# Altium PCB TinyBoard.PcbDoc
Units mil, origin at the board's own origin, x right, y up, seen from the top; angles counter-clockwise.
Board outline 785 x 3205 mil, 2 copper layers (Top Layer, Bottom Layer); 102 components, 79 nets, 303 pads, 74 vias.
Unrouted connection lines stored in the file: 1.
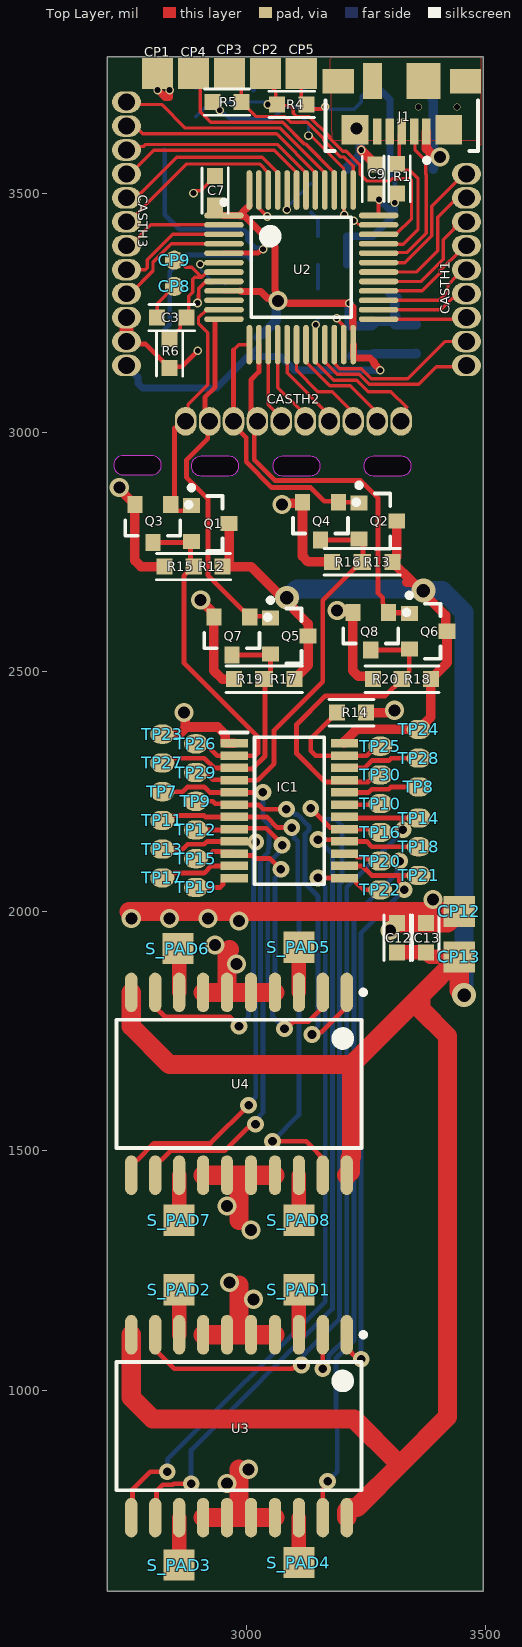
[diagram p0: Top Layer view]
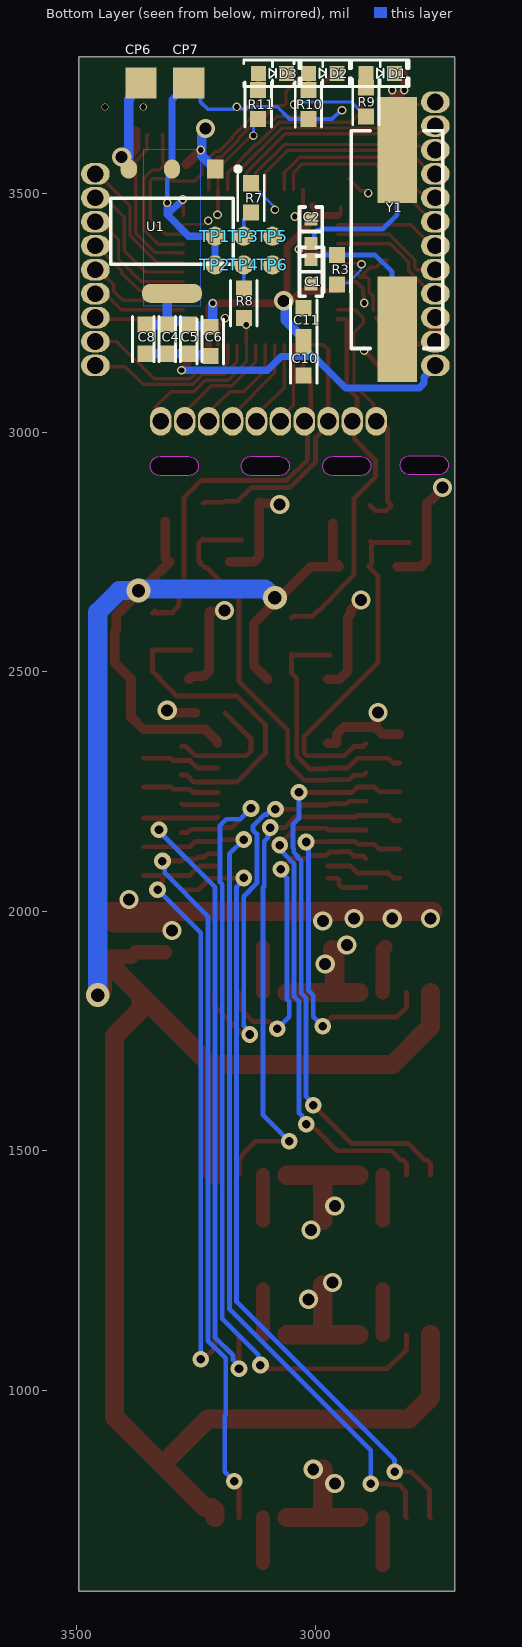
[diagram p1: Bottom Layer view, seen from below]
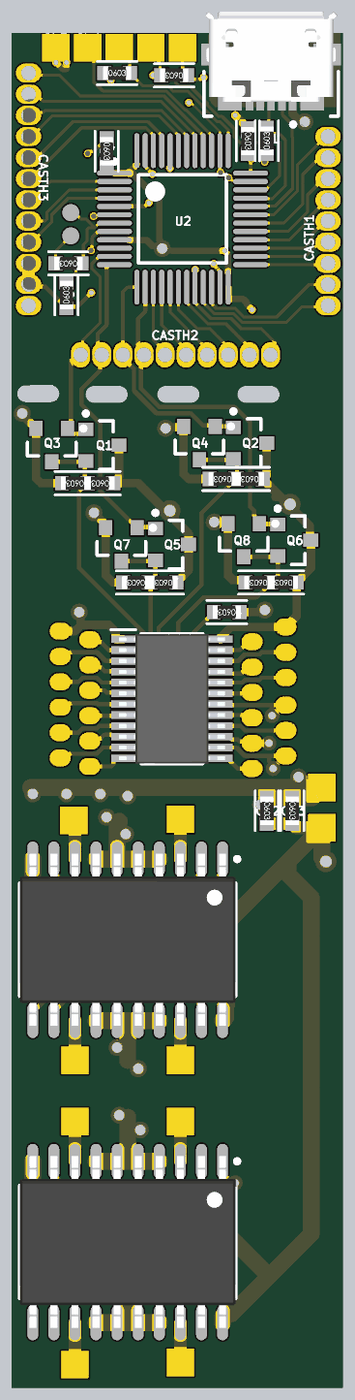
[diagram p2: 3D render of the assembled board from above, using the file's embedded part models]
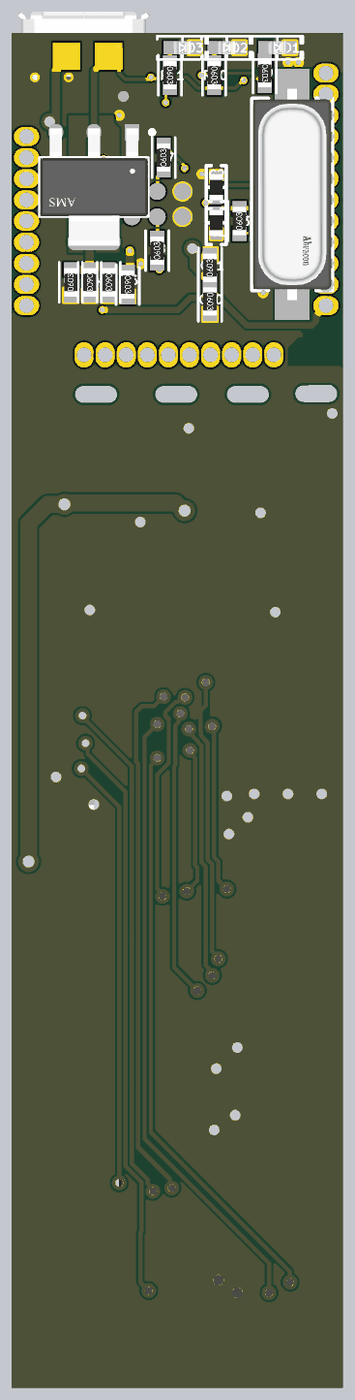
[diagram p3: 3D render of the assembled board from below, using the file's embedded part models]

## Layer stack, top to bottom
Top Solder: solder mask 0.4, Solder Resist, Dk 3.5
Top Layer: signal copper 1.4
Dielectric 1: dielectric 12.6, FR-4, Dk 4.8
Bottom Layer: signal copper 1.4
Bottom Solder: solder mask 0.4, Solder Resist, Dk 3.5

## Board outline
2710,580 2710,3785 3495,3785 3495,580
cut-out: 3265,2910 3325,2910 ccw(c3325,2930) 3325,2950 3265,2950 3265.07,2949.96 ccw(c3265.06,2929.98)
cut-out: 3075,2910 3135,2910 ccw(c3135,2930) 3135,2950 3075,2950 3075.07,2949.96 ccw(c3075.06,2929.98)
cut-out: 2905,2910 2965,2910 ccw(c2965,2930) 2965,2950 2905,2950 2905.07,2949.96 ccw(c2905.06,2929.98)
cut-out: 2743.02,2911.74 2803.02,2911.74 ccw(c2803.02,2931.74) 2803.02,2951.74 2743.02,2951.74 2743.09,2951.7 ccw(c2743.07,2931.72)

## Design rules (kind name [scope] priority, off if disabled: settings)
Clearance [All] p1: gap=5 ignorepadtopadclearanceinfootprint=FALSE except(0: Arc-Hole Track-Hole SMDPad-Hole THPad-Hole Via-Hole Fill-Hole Poly-Hole Region-Hole Text-Hole; 10: Fill-Text Poly-Text Region-Text Text-Text)
ComponentClearance [All] p1: gap=10 collisioncheckmode=3 verticalgap=10 showdistances=FALSE donotcheckwithout3dbody=TRUE
DiffPairsRouting [All] p1: maxlimit=10 minlimit=10 mostfreqgap=10 toplayer_minwidth=7 toplayer_maxwidth=15 toplayer_prefwidth=15 bottomlayer_minwidth=7 bottomlayer_maxwidth=15 bottomlayer_prefwidth=15 maxuncoupledlength=500
PolygonConnect [All] p1: connectstyle=Direct reliefconductorwidth=10 reliefentries=4 polygonreliefangle="90 Angle" airgapwidth=10
RoutingVias [All] p1: holewidth=18 width=35 viastyle="Through Hole" minholewidth=12 minwidth=30 maxholewidth=28 maxwidth=60
SolderMaskExpansion [All] p1: expansion=4 istentingtop=FALSE
SupplyNets "Schematic Supply Nets_2" [InNet('GND')] p1: voltage=0.000
SupplyNets "Schematic Supply Nets_1" [InNet('3V3')] p2: voltage=0.000
SupplyNets "Schematic Supply Nets" [InNet('5V')] p3: voltage=0.000
Width [All] p1: maxlimit=50 minlimit=5 preferedwidth=10 minimp=50.000000 maximp=50.000000 favimp=50.000000
28 further rules are at their usual default settings.

## Classes and differential pairs
component class addons_Hbridge,shiftReg: C12 C13 CP12 CP13 IC1 Q1 Q2 Q3 Q4 Q5 Q6 Q7 Q8 R12 R13 R14 R15 R16 R17 R18 R19 R20 S_PAD1 S_PAD2 S_PAD3 S_PAD4 S_PAD5 S_PAD6 S_PAD7 S_PAD8 TP7 TP8 TP9 TP10 TP11 TP12 TP13 TP14 TP15 TP16 TP17 TP18 TP19 TP20 TP21 TP22 TP23 TP24 TP25 TP26 TP27 TP28 TP29 TP30 U3 U4
component class Designator: C1 C2 C3 C4 C5 C6 C7 C8 C9 C10 C11 CASTH1 CASTH2 CASTH3 CP1 CP2 CP3 CP4 CP5 CP6 CP7 CP8 CP9 D1 D2 D3 J1 R1 R3 R4 R5 R6 R7 R8 R9 R10 R11 TP1 TP2 TP3 TP4 TP5 TP6 U1 U2 Y1
differential pair D: +D_P -D_N

## Components (designator, comment, footprint, x,y, rotation, side; value= is the part's Value field where it differs from the comment)
C1 "Capacitor" "CAP FILM 0603_1608" 3010,3335.59 r90 bottom value=10pF
C2 "Capacitor" "CAP FILM 0603_1608" 3010,3420 r270 bottom value=10pF
C3 "100nF" SMD-0603-RES 2844.49,3240 r90 top
C4 "10uF" SMD-0603-RES 3310,3195 r0 bottom
C5 "100nF" SMD-0603-RES 3265,3195 r0 bottom
C6 "100nF" SMD-0603-RES 3220,3190 r0 bottom
C7 "100nF" SMD-0603-RES 2935,3505 r180 top
C8 "100nF" SMD-0603-RES 3355,3195 r180 bottom
C9 "100nF" SMD-0603-RES 3270,3529.49 r180 top
C10 "1uF" SMD-0603-RES 3025,3150 r0 bottom
C11 "100nF" SMD-0603-RES 3025,3229.49 r180 bottom
C12 "Capacitor" SMD-0603-RES 3315,1945 r180 top value=100n
C13 "Capacitor" SMD-0603-RES 3375,1945 r180 top value=100n
CASTH1 "CastHeaderx10" NORM_HEADERX10 2873.5,3023.5 r270 top
CASTH2 "CastHeaderx9" NORM_HEADERX9 3460,3540 r180 top
CASTH3 "CastHeaderx12" NORM_HEADERX12 2750,3140 r0 top
CP1 "CONNECT_PAD" PAD_SQUARE 2815,3750 r0 top
CP2 "CONNECT_PAD" PAD_SQUARE 3040,3750 r90 top
CP3 "CONNECT_PAD" PAD_SQUARE 2965,3750 r90 top
CP4 "CONNECT_PAD" PAD_SQUARE 2890,3750 r90 top
CP5 "CONNECT_PAD" PAD_SQUARE 3115,3750 r90 top
CP6 "CONNECT_PAD" PAD_SQUARE 3365,3730 r90 bottom
CP7 "CONNECT_PAD" PAD_SQUARE 3265,3730 r90 bottom
CP8 "CONNECT_PAD" PCBComponent_1 2850,3305 r90 top
CP9 "CONNECT_PAD" PCBComponent_1 2850,3360 r90 top
CP12 "CONNECT_PAD" PAD_SQUARE 3445,2000 r90 top
CP13 "CONNECT_PAD" PAD_SQUARE 3445,1905 r90 top
D1 "Value" "LED 0603_1608" 2865,3750 r180 bottom
D2 "Value" "LED 0603_1608" 2985,3750 r180 bottom
D3 "Value" "LED 0603_1608" 3090,3750 r180 bottom
IC1 "STP16C596ATTR" SOP65P638X110-24N 3090,2210 r0 top
J1 "473460001" FP-473460001-MFG 3325,3720 r180 top
Q1 "BC807-40LT1G" ONSC-SOT-23-3-318-08_V 2925,2810 r0 top
Q2 "BC807-40LT1G" ONSC-SOT-23-3-318-08_V 3275,2815 r0 top
Q3 "MMBTA42LT1G" ONSC-SOT-23-3-318-08_V 2805,2810 r270 top
Q4 "MMBTA42LT1G" ONSC-SOT-23-3-318-08_V 3155,2815 r270 top
Q5 "BC807-40LT1G" ONSC-SOT-23-3-318-08_V 3090,2575 r0 top
Q6 "BC807-40LT1G" ONSC-SOT-23-3-318-08_V 3380,2585 r0 top
Q7 "MMBTA42LT1G" ONSC-SOT-23-3-318-08_V 2970,2575 r270 top
Q8 "MMBTA42LT1G" ONSC-SOT-23-3-318-08_V 3260,2585 r270 top
R1 "Resistor" SMD-0603-RES 3315,3530 r0 top value=1K5
R3 "Resistor" SMD-0603-RES 2955,3340 r180 bottom value=2K
R4 "10K" SMD-0603-RES 3095,3685 r90 top
R5 "10K" SMD-0603-RES 2960,3690 r270 top
R6 "10K" SMD-0603-RES 2840,3165 r0 top
R7 "100K" SMD-0603-RES 3135,3490 r180 bottom
R8 "100K" SMD-0603-RES 3150,3270 r180 bottom
R9 "150R" SMD-0603-RES 2895,3690 r0 bottom
R10 "470R" SMD-0603-RES 3015,3685 r0 bottom
R11 "150R" SMD-0603-RES 3120,3685 r0 bottom
R12 "Resistor" SMD-0603-RES 2920,2720 r90 top value=10K
R13 "Resistor" SMD-0603-RES 3274.49,2730 r90 top value=10K
R14 "Resistor" SMD-0603-RES 3220,2415 r90 top value=1K
R15 "Resistor" SMD-0603-RES 2860,2720 r90 top value=10K
R16 "Resistor" SMD-0603-RES 3210,2730 r90 top value=10K
R17 "Resistor" SMD-0603-RES 3070,2485 r90 top value=10K
R18 "Resistor" SMD-0603-RES 3355,2485 r90 top value=10K
R19 "Resistor" SMD-0603-RES 3005,2485 r90 top value=10K
R20 "Resistor" SMD-0603-RES 3295,2485 r90 top value=10K
S_PAD1 "SOLDER_PAD" PAD_SQUARE 3110,1210 r90 top
S_PAD2 "SOLDER_PAD" PAD_SQUARE 2860,1210 r90 top
S_PAD3 "SOLDER_PAD" PAD_SQUARE 2860,635 r90 top
S_PAD4 "SOLDER_PAD" PAD_SQUARE 3110,640 r90 top
S_PAD5 "SOLDER_PAD" PAD_SQUARE 3110,1925 r90 top
S_PAD6 "SOLDER_PAD" PAD_SQUARE 2857.5,1922.5 r90 top
S_PAD7 "SOLDER_PAD" PAD_SQUARE 2860,1355 r90 top
S_PAD8 "SOLDER_PAD" PAD_SQUARE 3110,1355 r90 top
TP1 "Value" PCBComponent_1 3210,3410 r90 bottom
TP2 "Value" PCBComponent_1 3210,3350 r90 bottom
TP3 "Value" PCBComponent_1 3150,3410 r90 bottom
TP4 "Value" PCBComponent_1 3150,3350 r90 bottom
TP5 "Value" PCBComponent_1 3090,3410 r90 bottom
TP6 "Value" PCBComponent_1 3090,3350 r90 bottom
TP7 "=Value" ROUND_SMALL 2825,2250 r90 top
TP8 "=Value" ROUND_SMALL 3360,2260 r270 top
TP9 "=Value" ROUND_SMALL 2895,2230 r270 top
TP10 "=Value" ROUND_SMALL 3280,2225 r270 top
TP11 "=Value" ROUND_SMALL 2825,2190 r270 top
TP12 "=Value" ROUND_SMALL 2895,2170 r270 top
TP13 "=Value" ROUND_SMALL 2825,2130 r270 top
TP14 "=Value" ROUND_SMALL 3360,2195 r270 top
TP15 "=Value" ROUND_SMALL 2895,2110 r270 top
TP16 "=Value" ROUND_SMALL 3280,2165 r270 top
TP17 "=Value" ROUND_SMALL 2825,2070 r270 top
TP18 "=Value" ROUND_SMALL 3360,2135 r270 top
TP19 "=Value" ROUND_SMALL 2895,2050 r270 top
TP20 "=Value" ROUND_SMALL 3280,2105 r270 top
TP21 "=Value" ROUND_SMALL 3360,2075 r270 top
TP22 "=Value" ROUND_SMALL 3280,2045 r270 top
TP23 "=Value" ROUND_SMALL 2825,2370 r270 top
TP24 "=Value" ROUND_SMALL 3360,2380 r270 top
TP25 "=Value" ROUND_SMALL 3280,2345 r270 top
TP26 "=Value" ROUND_SMALL 2895,2350 r270 top
TP27 "=Value" ROUND_SMALL 2825,2310 r270 top
TP28 "=Value" ROUND_SMALL 3360,2320 r270 top
TP29 "=Value" ROUND_SMALL 2895,2290 r270 top
TP30 "=Value" ROUND_SMALL 3280,2285 r270 top
U1 "AMS1117-3.3" FP-AMS1117-IPC_C 3300,3420.43 r270 bottom
U2 "STM32F103C6T6A" STM-LQFP48_M 3115,3345 r0 top locked
U3 "L293DD" STM-SOIC-20_M 2985,925 r270 top
U4 "L293DD" STM-SOIC-20_M 2985,1640 r270 top
Y1 "ABLS-8.000MHZ-B2-T" FP-ABLS-MFG 2830,3402.99 r270 bottom

## Footprints (in the part's own frame and the unit in brackets; to place one, negate y for a bottom-side part, rotate by r counter-clockwise, add the part's x,y. Pads: shape width x height; smd on the part's side, far side on the other; paste and mask are expansions set on the pad)
"CAP FILM 0603_1608" [mm] "Chip Capacitor, 2-Leads, Body 1.60x0.80mm, IPC Medium Density"
  rect 0.7x0.7 smd: 1(-0.65,0) 2(0.65,0)
  silkscreen extent -1.3,-0.6 1.3,0.6, body extent -0.8,-0.4 0.8,0.4, height 0.7
FP-473460001-MFG [mm]
  rect 0.45x1.38 smd paste+0 mask+0: 1(-1.3,2.31) 2(-0.65,2.31) 3(0,2.31) 4(0.65,2.31) 5(1.3,2.31)
  rect 1.425x1.55 smd paste+0 mask+0: 6(-2.488,2.225) 7(2.488,2.225)
  rect 1.65x1.3 smd paste+0 mask+0: 8(-3.375,-0.35) 11(3.375,-0.35)
  rect 1.8x1.9 smd paste+0 mask+0: 9(-1.15,-0.35)
  rect 1x1.9 smd paste+0 mask+0: 10(1.55,-0.35)
  silkscreen extent -4.05,0.67 4.05,3.97, body extent -4.3,-2.48 4.3,3.45, height 0.25
FP-ABLS-MFG [mm]
  rect 5.6x2.1 smd paste+0 mask+0: 1(-4.75,0) 2(4.75,0)
  silkscreen extent -5.77,-2.42 5.77,2.42, body extent -6.35,-2.35 6.35,2.35, height 4.3
FP-AMS1117-IPC_C [mm]
  rect 1.004x0.872 smd paste+0 mask+0: 1(-3.295,2.29)
  rrect100% 1.004x0.872 smd paste+0 mask+0: 2(-3.295,0) 3(-3.295,-2.29)
  rrect87% 1.004x3.182 smd paste+0 mask+0: 4(3.295,0)
  silkscreen extent -3.42,-3.25 1.75,3.62, body extent -3.53,-3.25 3.53,3.25, height 1.8
"LED 0603_1608" [mm] "Chip Diode, 2-Leads, Body 1.60x0.80mm, IPC Medium Density"
  rect 0.8x0.8 smd: 1(-0.75,0) 2(0.75,0)
  silkscreen extent -1.52,-0.7 1.52,0.7, body extent -0.8,-0.4 0.8,0.4, height 0.53
NORM_HEADERX9 [mil]
  oval 60x45 hole 35: 1(0,0) 2(0,50) 3(0,100) 4(0,150) 5(0,200) 6(0,250) 7(0,300) 8(0,350) 9(0,400)
NORM_HEADERX10 [mil]
  oval 60x45 hole 35: 1(0,0) 2(0,50) 3(0,100) 4(0,150) 5(0,200) 6(0,250) 7(0,300) 8(0,350) 9(0,400) 10(0,450)
NORM_HEADERX12 [mil]
  oval 60x45 hole 35: 1(0,0) 2(0,50) 3(0,100) 4(0,150) 5(0,200) 6(0,250) 7(0,300) 8(0,350) 9(0,400) 10(0,450) 11(0,500) 12(0,550)
ONSC-SOT-23-3-318-08_V [mm] "SOT23, 3-Leads, Body 2.92x1.3mm, Pitch 0.95mm"
  rect 0.9x0.8 smd: 1(-1,0.95) 2(-1,-0.95) 3(1,0)
  silkscreen extent -1.12,-1.46 0.65,2.02, body extent -0.65,-1.46 0.65,1.46, height 1.11
PAD_SQUARE [mil]
  rect 65x65 smd paste-99999: 1(0,0)
PCBComponent_1 [mil]
  round 40 smd: 1(0,0)
ROUND_SMALL [mil]
  oval 40x50 smd paste-99999: 1(0,0)
SMD-0603-RES [mm]
  rect 0.85x0.85 smd: 1(0,0.775) 2(0,-0.775)
  silkscreen extent -0.7,-1.2 0.7,1.2, body extent -0.4,-0.85 0.4,0.85, height 0.56
SOP65P638X110-24N [mm]
  rect 1.45x0.45 smd: 1(-2.925,3.575) 2(-2.925,2.925) 3(-2.925,2.275) 4(-2.925,1.625) 5(-2.925,0.975) 6(-2.925,0.325) 7(-2.925,-0.325) 8(-2.925,-0.975) 9(-2.925,-1.625) 10(-2.925,-2.275) 11(-2.925,-2.925) 12(-2.925,-3.575) 13(2.925,-3.575) 14(2.925,-2.925) 15(2.925,-2.275) 16(2.925,-1.625) 17(2.925,-0.975) 18(2.925,-0.325) 19(2.925,0.325) 20(2.925,0.975) 21(2.925,1.625) 22(2.925,2.275) 23(2.925,2.925) 24(2.925,3.575)
  silkscreen extent -3.65,-3.9 1.85,4.15, body extent -3.19,-3.9 3.19,3.9, height 1.1
STM-LQFP48_M [mm] "QFP, 48-Leads, Body 7x7mm, Pitch 0.5mm, IPC Low Density"
  oval 2.1x0.3 smd: 1(-4.1,2.75) 2(-4.1,2.25) 3(-4.1,1.75) 4(-4.1,1.25) 5(-4.1,0.75) 6(-4.1,0.25) 7(-4.1,-0.25) 8(-4.1,-0.75) 9(-4.1,-1.25) 10(-4.1,-1.75) 11(-4.1,-2.25) 12(-4.1,-2.75) 25(4.1,-2.75) 26(4.1,-2.25) 27(4.1,-1.75) 28(4.1,-1.25) 29(4.1,-0.75) 30(4.1,-0.25) 31(4.1,0.25) 32(4.1,0.75) 33(4.1,1.25) 34(4.1,1.75) 35(4.1,2.25) 36(4.1,2.75)
  oval 0.3x2.1 smd: 13(-2.75,-4.1) 14(-2.25,-4.1) 15(-1.75,-4.1) 16(-1.25,-4.1) 17(-0.75,-4.1) 18(-0.25,-4.1) 19(0.25,-4.1) 20(0.75,-4.1) 21(1.25,-4.1) 22(1.75,-4.1) 23(2.25,-4.1) 24(2.75,-4.1) 37(2.75,4.1) 38(2.25,4.1) 39(1.75,4.1) 40(1.25,4.1) 41(0.75,4.1) 42(0.25,4.1) 43(-0.25,4.1) 44(-0.75,4.1) 45(-1.25,4.1) 46(-1.75,4.1) 47(-2.25,4.1) 48(-2.75,4.1)
  silkscreen extent -4.22,-2.65 2.65,3.57, body extent -3.5,-3.5 3.5,3.5, height 1.6
STM-SOIC-20_M [mm] "SOIC, 20-Leads, Body 13x7.6mm, Pitch 1.27mm, IPC Low Density"
  oval 2.1x0.65 smd: 1(-4.85,5.715) 2(-4.85,4.445) 3(-4.85,3.175) 4(-4.85,1.905) 5(-4.85,0.635) 6(-4.85,-0.635) 7(-4.85,-1.905) 8(-4.85,-3.175) 9(-4.85,-4.445) 10(-4.85,-5.715) 11(4.85,-5.715) 12(4.85,-4.445) 13(4.85,-3.175) 14(4.85,-1.905) 15(4.85,-0.635) 16(4.85,0.635) 17(4.85,1.905) 18(4.85,3.175) 19(4.85,4.445) 20(4.85,5.715)
  silkscreen extent -4.97,-6.5 3.4,6.72, body extent -5.16,-6.5 5.16,6.5, height 2.65

## Part data
C3 C4 C5 C6 C7 C8 C9 C10 C11: library part Capacitor, "SMT Capacitor"
D1: library part LED, "orange"
D2: library part LED, "green"
D3: library part LED, "blue"
IC1: "Integrated Circuit", Manufacturer_Name=STMicroelectronics, Mouser Part Number=N/A, Datasheet Link=https://www.st.com/resource/en/datasheet/cd00005085.pdf, Height=1.1mm, Manufacturer_Part_Number=STP16C596ATTR, Mouser Price/Stock=https://www.mouser.co.uk/ProductDetail/STMicroelectronics/STP16C596ATTR?qs=y2Ae8b0edtM6tyumk2sS7g%3D%3D
J1: library part CMP-2000-05246-2, "CONN RCPT USB2.0 MICRO B SMD R/A", Current Rating=1.8A, Manufacturer=Molex, Package=0, Temperature="-30°C to +85°C", Temperature Range High=+85°C, Temperature Range Low=-30°C, Voltage Rating=30V, Automotive=No, Category=Conn, ComponentLink2Description=Datasheet, ComponentLink2URL=https://www.molex.com/webdocs/datasheets/pdf/en-us/0473460001_IO_CONNECTORS.pdf, Conn Orientation="Right Angle", Contact Material=Gold,Nickel, Device Class L1=Connectors, Device Class L2="USB Connectors", Device Class L3=unset, Digikey Description="CONN RCPT USB2.0 MICRO B SMD R/A", Footprint Url=https://www.molex.com/pdm_docs/sd/473460001_sd.pdf, Height=2.945mm, Is Female=yes, Lead Free=Yes, Manufacturer Part Number=473460001, Number of Contacts=5, Octopart=https://octopart.com/47346-0001-molex-7164928, Pitch=0.65mm, RoHS=TRUE, Shielding=true, Usb Standard="USB 2.0"
Q1 Q2 Q5 Q6: library part CMP-1048-00745-1, "General Purpose Transistor, PNP Silicon, 3-Pin SOT-23, Pb-Free, Tape and Reel", Manufacturer="On Semiconductor", ComponentLink1Description="Manufacturer URL", ComponentLink1URL=http://www.onsemi.com/, ComponentLink2Description=Datasheet, ComponentLink2URL=http://www.onsemi.com/pub_link/Collateral/BC807-16LT1-D.PDF, ComponentLink3Description="Package Specification", ComponentLink3URL=http://www.onsemi.cn/pub_link/Collateral/318-08.PDF, DatasheetVersion="Rev. 10", fT Min (MHz)=100, IC Continuous (A)=-0.5, Mounting Technology="Surface Mount", PackageDescription="3-Pin Small Outline Transistor, Body 2.92 x 1.3 mm, Pitch 0.95 mm", PackageReference=SOT-23-3-318-08, PackageVersion="Rev. AP, 11/2009", Packing="Tape and Reel", PartNumber=BC807-40LT1G, Polarity=PNP, RoHS=TRUE
Q3 Q4 Q7 Q8: library part CMP-1048-00662-1, "High Voltage Transistor, NPN Silicon, 3-Pin SOT-23, Pb-Free, Tape and Reel", Manufacturer="On Semiconductor", ComponentLink1Description="Manufacturer URL", ComponentLink1URL=http://www.onsemi.com/, ComponentLink2Description=Datasheet, ComponentLink2URL=http://www.onsemi.cn/pub_link/Collateral/MMBTA42LT1-D.PDF, ComponentLink3Description="Package Specification", ComponentLink3URL=http://www.onsemi.cn/pub_link/Collateral/318-08.PDF, DatasheetVersion="Rev. 12", fT Min (MHz)=50, IC Continuous (A)=0.5, Mounting Technology="Surface Mount", PackageDescription="3-Pin Small Outline Transistor, Body 2.92 x 1.3 mm, Pitch 0.95 mm", PackageReference=SOT-23-3-318-08, PackageVersion="Rev. AP, 11/2009", Packing="Tape and Reel", PartNumber=MMBTA42LT1G, Polarity=NPN, RoHS=TRUE
R4 R5 R6 R7 R8 R9 R10 R11: library part Resistor, "SMT Resistor"
TP1 TP2 TP3 TP4 TP5 TP6 TP7 TP8 TP9 TP10 TP11 TP12 TP13 TP14 TP15 TP16 TP17 TP18 TP19 TP20 TP21 TP22 TP23 TP24 TP25 TP26 TP27 TP28 TP29 TP30: library part TEST_PAD
U1: library part CMP-209535-000001-1, "LDO Voltage Regulators 1A, 3.3V", Dropout Voltage=1.1V, Manufacturer="Advanced Monolithic Systems", Max Junction Temp=+125°C, Max Power Dissipation=1.2W, Max Supply Voltage=15V, Nominal Supply Current=5mA, Output Current=1A, Output Voltage=3.3V, Package=AMS1117, Temperature="-40°C to +125°C", Temperature Range Low=-40°C, Automotive=No, Category=IC, ComponentLink2Description=Datasheet, ComponentLink2URL=http://www.advanced-monolithic.com/pdf/ds1117.pdf, Device Class L1="Integrated Circuits (ICs)", Device Class L2="Power Management ICs", Device Class L3="Voltage Regulators - Linear", Height=1.8mm, Ipc Land Pattern Name=SOT229P700X180-4, Lead Free=Yes, Manufacturer Part Number=AMS1117-3.3, Number Of Outputs=1, Octopart=https://octopart.com/ams1117-3.3-advanced+monolithic+systems-25899300, Output Type=Fixed, RoHS=TRUE, Standoff Height=0.64mm, Temperature Range High=+125°C
U2: library part CMP-0237-00254-3, "ARM Cortex-M3 32-bit MCU, 32 KB Flash, 10 KB Internal RAM, 37 I/Os, 48-pin LQFP, -40 to 85 degC, Tray", I/Os (High Current)=37, Operating Frequency(F) (Processor speed) (MHz)=72, Supply Voltage(Vcc) min (V)=2, A/D Converter="2x12-bit (10 Channel)", ComponentLink1Description="Manufacturer URL", ComponentLink1URL=http://www.st.com/web/en/home.html, ComponentLink2Description=Datasheet, ComponentLink2URL=http://www.st.com/st-web-ui/static/active/en/resource/technical/document/datasheet/CD00210843.pdf, ComponentLink3Description="Package Specification", ComponentLink3URL=http://www.st.com/st-web-ui/static/active/en/resource/technical/document/datasheet/DM00058181.pdf, Core="ARM Cortex-M3", DatasheetVersion="Rev. 6", FLASH Size (Prog) (kB)=32, Internal RAM Size (kB)=10, Mounting Technology="Surface Mount", PackageDescription="48-Pin Low Profile Quad Flat Package, 7 x 7 mm Body, 0.5 mm Pitch", PackageReference=LQFP48, PackageVersion="Rev. 6, 06/2013", Packing=Tray, PartNumber=STM32F103C6T6A
U3 U4: library part CMP-1771-00003-1, "Push-Pull Four Channel Driver with Diodes, 4.5 to 36 V, 20-Pin SOIC, RoHS, Tube", Case Code (Imperial)=0603, Case Code (Metric)=1608, Max Operating Temperature="155 degC", Min Operating Temperature="-55 degC", Package Quantity=5000, Power Rating="100 mW", Resistance="15 kohm", Tolerance=1%, Voltage Rating="50 V", Case\Package=0603, ComponentLink1Description="Manufacturer URL", ComponentLink1URL=http://www.st.com/, ComponentLink2Description=Datasheet, ComponentLink2URL=http://www.st.com/content/ccc/resource/technical/document/datasheet/04/ac/22/f9/20/5d/43/a1/CD00000059.pdf/files/CD00000059.pdf/jcr:content/translations/en.CD00000059.pdf, DatasheetVersion=Jul-03, Height="0.45 mm", Length="1.6 mm", Mount="Surface Mount", PackageDescription="20-Pin Small Outline Integrated Circuit, Body 12.8 x 7.5 mm, Pitch 1.27 mm", PackageReference=SOIC-20, Packaging="Tape and Reel", REACH SVHC=Unknown, RoHSCompliant=true, Width="0.8 mm"
Y1: library part CMP-27762-009874-1, "CRYSTAL 8.0000MHZ 18PF SMD", Case/Package=SMD/SMT, ESR (Equivalent Series Resistance)=80R, Frequency=8MHz, Frequency Stability=50ppm, Frequency Tolerance=20ppm, Load Capacitance=18pF, Max Operating Temperature=70°C, Min Operating Temperature=-20°C, Operating Frequency="8 MHz", Package Quantity=1000, Accuracy=20ppm, Contact Plating=Tin, Depth=4.7mm, Height=0.165inch, Lead Free="Lead Free", Length=11.4mm, Mount="Surface Mount", Number of Pins=2, Packaging="Tape and Reel", Radiation Hardening=No, REACH SVHC="No SVHC", Series=ABLS, Series Resistance=80R, Termination=SMD/SMT, Tolerance=20ppm, Width=4.7mm
C1 C2 C12 C13: SimulationGenericComponent=True
R1 R3 R12 R13 R14 R15 R16 R17 R18 R19 R20: SimulationGenericComponent=True, TC1=0, TC2=0

## Via types
v1: diameter 35, hole 18, Top Layer to Bottom Layer, tented both sides, 24 vias
v2: diameter 40/40 (per signal layer), hole 25, Top Layer to Bottom Layer, tented both sides, 23 vias
v3: diameter 18, hole 12, Top Layer to Bottom Layer, 22 vias
v4: diameter 50, hole 28, Top Layer to Bottom Layer, tented both sides, 3 vias
v5: diameter 15, hole 12, Top Layer to Bottom Layer, 2 vias

## Nets (pads, with @x,y where several pads share a name; then routed paths per layer and width w, separated by ;. In a path a pad name is that pad's centre, name@x,y a point inside that pad or via, vN(x,y) a via of type N, cw(c..) or ccw(c..) an arc to the next point about the centre after c; other vN are vias at no path point)
3V3: C4.2 C5.2 C6.2 C7.1 C8.1 C9.1 C10.2 C11.2 CASTH3.1 CP5.1 CP7.1 R1.2 R4.2 R5.2 R10.1 TP1.1 TP2.1 U1.2 U1.4 U2.1 U2.9 U2.24 U2.36 U2.48 | length 2762.8
  Top Layer w8: C7.1@2947.73,3471.42 2947.73,3455.03 2949.49,3453.27 U2.1 ; CP5.1 3115,3695.51 R4.2 3135.02,3675.49 3157.79,3675.49 3162.29,3680 v3(3165,3680) ; U2.36 C9.1@3276.42,3486.24
  Top Layer w10: U2.9 U2.9@2975.79,3295.79
  Top Layer w15: U2.1 2985.83,3453.27 2997.56,3465 ; U2.9@2987.42,3295.79 2988.7,3295.79 2989.98,3294.51 3030.49,3294.51 3044.48,3280.52 v2@3055.52,3280.52 ; U2.1@2987.42,3451.99 2996.64,3451.99 3060,3388.63 3060,3296.29 3061.95,3294.34 3061.95,3283.68 3060,3281.73 v2(3066.73,3275) ; 3000,3467.44 U2.48@3006.73,3474.17 ; v2@3055.52,3275 v2@3060,3275 ; v2@3071.29,3275 3076.07,3270.22 3087.8,3270.22 3088.02,3270 v3(3215,3270) ; 3222.58,3261.61 3222.58,3229.11 3223.27,3228.42 U2.24@3223.27,3217.42 ; U2.24@3223.8,3183.58 3223.8,3156.71 3224.86,3155.65 3258.54,3155.65 3267.33,3146.86 3267.33,3143.49 3280,3130.81 v3(3280,3130)
  Bottom Layer w8: v3(2945,3672.78) 2947.22,3672.78 2965.51,3654.49 R10.1 3054.49,3654.49 3080.22,3680.22 3140.46,3680.22 3144.55,3676.13 3155.31,3676.13 3157.27,3678.09 3163.09,3678.09 v3(3165,3680) 3167.71,3680 3172.71,3675 3225,3675 3240.19,3690.19 3240.19,3701.5 3253.69,3715 CP7.1@3265,3715
  Bottom Layer w10: 2996.22,3156.22 3000.71,3156.22 3003.21,3158.72 C10.2 ; U1.2 3300,3540.97 3310,3530.97 v3(3310,3480)
  Bottom Layer w15: CASTH3.1 2750,3139.38 2773.85,3115.54 2773.85,3102.88 2783.48,3093.25 2937.74,3093.25 3003.21,3158.72 3071.91,3158.72 3100.63,3130 v3(3280,3130) ; TP2.1 3210,3409.9 3210.1,3410 3265,3410 3310,3455 ; CP7.1 3300,3695 U1.2 ; v3(3277.55,3486.57) 3309.12,3455 3310,3455 ; v3(3310,3480) 3310,3455
  Bottom Layer w20: C11.2 3031.73,3205.71 3034.5,3205.71 3062.91,3234.11 3062.91,3271.17 v2(3066.73,3275) ; v3(3215,3270) 3215,3225.51 C6.2 3222.5,3223.01 3262.5,3223.01 C5.2 3271.73,3232.24 C4.2@3305.67,3232.24 ; CP7.1 3265,3715 3268.28,3715 CP7.1@3275.78,3707.5 ; C4.2@3315,3236.57 C4.2@3310,3236.57 ; C8.1 C4.2 C4.2@3310,3236.57 ; C4.2@3310,3236.57 U1.4@3310,3281.49 ; U1.4@3310,3281.49 3315,3281.49 3305.78,3290.71 U1.4 3309.22,3281.49 U1.4@3310,3281.49
5V: C12.1 C13.1 CP6.1 CP13.1 IC1.24 J1.1 Q1.3 Q2.3 Q5.3 Q6.3 R12.2 R13.2 R17.2 R18.2 TP24.1 U1.3 U3.10 U3.20 U4.10 U4.20 | length 5886.4
  Top Layer w20: Q1.3 2964.37,2733.86 R12.2 3010,2720 v4@3080,2650 ; v4(3085,2655) 3085,2646.88 3098.89,2632.99 3098.89,2631.11 3129.37,2600.63 Q5.3 3129.37,2513.86 R17.2 ; IC1.24 3205.16,2355.16 3230,2380 TP24.1 3360,2380.41 3385.51,2405.92 R18.2 3419.37,2518.86 Q6.3 3416.74,2587.63 3416.74,2618.26 3347.5,2687.5 ; Q2.3 3314.37,2739.37 R13.2 3347.5,2687.5 ; 3335.62,2687.5 3347.5,2687.5 ; J1.1 3376.18,3592.8 3386.99,3581.99 v2@3391.99,3576.99
  Top Layer w30: C12.1 C13.1 3384.49,1905 CP13.1
  Top Layer w40: U3.10 2760,985 2805,940 3225,940 3315.28,849.72 3325.67,849.72 ; U4.10 2760,1760 2840,1680 3220,1680 ; U3.20 3210,748.19 3217.2,755.39 3231.34,755.39 3325.67,849.72 ; U4.20 3217.2,1456.26 3217.2,1484.8 3220,1487.6 3220,1680 ; v4(3455,1825) 3445,1835 CP13.1 3365,1825 ; 3220,1680 3365,1825 ; 3325.67,849.72 3420,944.06 3420,1740 3365,1795 3365,1825
  Bottom Layer w20: CP6.1 3387.5,3707.5 CP6.1@3387.5,3698.44 ; U1.3 3390.16,3695.78
  Bottom Layer w40: v4(3085,2655) 3087.71,2655 3105.79,2673.09 3364.21,2673.09 3367.4,2669.9 3410.1,2669.9 3455,2625 v4(3455,1825)
  other v2: 3405,3575
  other v4: 3370,2670
ASYNC_SWO: CP4.1 U2.39 | length 454.6
  Top Layer w7: CP4.1 2904.26,3735.74 2904.26,3669.75 2926.23,3647.77 3075.95,3647.77 3121.22,3602.5 3123.94,3602.5 3183.9,3542.54 U2.39
AUX_LED: R11.1 U2.38 | length 237.6
  Top Layer w6: v3(3130,3620) 3132.3,3617.7 3137.3,3617.7 3203.58,3551.42 U2.38
  Top Layer w8: U2.38 3203.58,3458.31 3205,3456.89 v3(3205,3455)
  Bottom Layer w6: R11.1 3130,3644.49 v3(3130,3620)
BOOT0: R7.1 U2.44 | length 76.2
  Bottom Layer w6: v3(3085,3465) 3086.72,3466.72 3086.72,3472.23 R7.1
BOOT1: CASTH1.10 R8.2 U2.20 | length 357.9
  Top Layer w7: v3(3145,3225) 3144.76,3224.76 3144.76,3183.82 U2.20 3144.53,3147.46 3182.62,3109.37 3230.63,3109.37 3254.63,3085.37 3302.13,3085.37 3335,3052.5 3323.5,3041 CASTH1.10
  Bottom Layer w7: v3(3145,3225) 3150,3230 R8.2
CLK: IC1.3 Q5.2 Q7.3 R17.1 R19.2 TP27.1 | length 537.7
  Top Layer w10: TP27.1 2838.12,2310 2848.12,2320 2912.43,2320 2932.86,2299.57 IC1.3 2976.88,2297.53 3012.53,2297.53 3039.49,2324.49 R17.1 ; Q7.3 3048.66,2535.63 Q5.2 3050.63,2498.23 R17.1@3038.44,2486.05
CLK_33: CASTH1.2 Q5.1 Q7.1 U2.12 | length 790
  Top Layer w10: U2.12 2937.22,3236.73 2935,3234.51 2935,3094.71 2913.81,3073.53 2913.81,3050.16 2923.5,3040.47 CASTH1.2 2919.57,3019.57 2919.57,2986.9 2875.07,2942.4 2875.07,2906.55 2920,2861.62 2920,2701.77 2994.68,2627.09 2996.65,2627.09 Q7.1@3007.4,2616.34 ; Q7.1 Q7.1@3007.4,2616.34 ; Q7.1@3007.4,2616.34 Q5.1@3046.69,2616.34 ; Q5.1@3046.69,2616.34 Q5.1 ; Q5.1@3046.69,2616.34 Q5.1 ; Q5.1@3046.69,2616.34 Q5.1 ; Q5.1@3046.69,2616.34 Q5.1
D_N: J1.2 U2.32 | length 332.5
  Top Layer w7: U2.32 3277.34,3375.45 3316.17,3375.45 3316.59,3375.87 3335.3,3375.87 3375.63,3416.2 3375.63,3538.41 3375,3539.04 3375,3567.82 3352.4,3590.42 3352.4,3620.04 J1.2@3350.59,3621.85
D_P: J1.3 R1.1 U2.33 | length 323.6
  Top Layer w7: U2.33 3277.34,3393.29 3316.17,3393.29 3316.59,3392.87 3328.26,3392.87 3358.63,3423.24 3358.63,3531.37 3341.9,3548.1 3327.41,3548.1 R1.1 3319.5,3565.01 3319.5,3622.35 J1.3@3320,3621.85
GND: C1.1 C2.1 C4.1 C5.1 C6.1 C7.2 C8.2 C9.2 C10.1 C11.1 C12.2 C13.2 CASTH3.2 CASTH3.3 CP1.1 CP12.1 D1.2 D2.2 D3.2 IC1.1 J1.4 J1.5 J1.6 J1.7 J1.8 J1.9 J1.10 J1.11 Q3.2 Q4.2 Q7.2 Q8.2 R6.2 R14.2 R15.1 R16.1 R19.1 R20.1 TP5.1 TP6.1 TP23.1 U1.1 U2.8 U2.23 U2.35 U2.47 U3.4 U3.5 U3.6 U3.7 U3.14 U3.15 U3.16 U3.17 U4.4 U4.5 U4.6 U4.7 U4.14 U4.15 U4.16 U4.17 | length 3890.3
  Top Layer w5: v3(3224.27,3442.45) 3226.51,3442.45 3234.08,3434.89 3275.11,3434.89 U2.35
  Top Layer w8: v3(2890,3500) 2890,3505 2905,3505 C7.2@2930,3530 ; v3(2898.24,3270.53) 2900.16,3272.45 2900.16,3287.17 2901,3288.02 2901,3301.02 2913.55,3313.57 2915.21,3313.57 2917.12,3315.47 U2.8 ; U2.47 3026.42,3469.95 3028.32,3468.05 3028.32,3466.69 v3(3043.8,3451.21) ; v3(3189.27,3238.92) 3189.27,3236.39 3202.85,3222.81 3202.85,3184.31 U2.23
  Top Layer w10: CASTH3.2 2755,3185 2789.49,3185 R6.2 2843.02,3137.51 2865.87,3137.51 v3(2898.86,3170.5)
  Top Layer w15: CP1.1 v3(2815,3715) 2815.81,3715 2830.81,3700 2839.43,3700 2839.43,3714.43 v3(2840,3715)
  Top Layer w20: v2(2735,2885) 2735,2881.97 2759.88,2857.09 2761.85,2857.09 2767.6,2851.34 Q3.2 2767.6,2732.4 2780,2720 R15.1 ; TP23.1 2825.1,2370.1 2860.61,2370.1 2875.5,2385 ; v2(2870,2415) 2873.11,2411.89 2873.11,2387.4 2875.5,2385 ; v2(2905,2650) 2926.85,2628.15 2926.85,2620.12 Q7.2 2932.6,2502.4 2950,2485 R19.1 ; IC1.1 2957.44,2350.75 2956.3,2351.89 2956.3,2369.29 2940.59,2385 2875.5,2385 ; v2(3075,2850) 3077.18,2852.18 3115.41,2852.18 Q4.2 3117.6,2741.72 3129.31,2730 R16.1 ; v2(3190,2628.09) 3191.86,2626.23 3220.74,2626.23 Q8.2 3222.6,2502.4 3234.31,2490.69 3258.8,2490.69 R20.1 ; v3(3240,3590) C9.2 ; R14.2 3299.59,2415 3304.59,2420 v2(3310,2420)
  Top Layer w30: CASTH3.2 CASTH3.3
  Top Layer w40: v2@2755,2000 CP12.1 3420.51,1975.51 C13.2 C12.2 ; U3.14 U3.15 2985,734.06 ; U3.7 U3.6 2985,1115.94 ; U4.14 U4.15 2985,1449.06 ; U4.7 U4.6 ; 2965,1920 2960,1915 U4.6 ; v2@2985,835 2985,734.06 ; 2985,1220 2985,1115.94 ; 2985,1355 2985,1449.06 ; U3.17 U3.16 2985,734.06 ; U3.4 U3.5 2985,1115.94 ; U4.17 U4.16 2985,1449.06 ; U4.4 U4.5 U4.6
  Bottom Layer w20: U1.1 3209.84,3552.76 3217.01,3559.93 3219.61,3559.93 3238.06,3578.37 3238.06,3621.53 3230,3629.59 v2(3230,3635) ; C6.1 3222.5,3161.99 3262.5,3161.99 C5.1 C4.1 C8.2 C8.2@3355.51,3165
  other v2: 2960,805 3005,835 3015,1190 2965,1225 3010,1335 2960,1385 2980,1890 2935,1930 3300,1960 2985,1980 2760,1985 2840,1985 2920,1985 3390,2025
  other v5: 3360,3680 3440,3680
LE: IC1.4 Q2.2 Q4.3 R13.1 R16.2 TP29.1 | length 819.3
  Top Layer w10: TP29.1 2900.74,2284.26 2920.74,2284.26 2930,2275 2973.82,2275 IC1.4 3023.98,2273.98 3058.2,2308.2 3058.2,2378.2 3160,2480 3160,2649.49 3228.78,2718.27 3232.24,2718.27 3240.51,2726.54 R16.2 R13.1 3243.98,2769.25 Q2.2 3233.66,2775.63 Q4.3
LE_3v3: CASTH1.3 Q2.1 Q4.1 U2.13 | length 553.9
  Top Layer w7: 2973.5,3172.44 2984.64,3183.58 U2.13
  Top Layer w10: 2973.5,3172.44 2973.5,3015.97 3000,2989.47 3000,2938.79 3053.79,2885 3134.58,2885 3163.24,2856.34 3190.43,2856.34 Q4.1 3233.66,2854.37 Q2.1
NetC1_2: C1.2 R3.1 Y1.2 | length 311.7
  Bottom Layer w10: Y1.2 2840.36,3226.35 2840.36,3335.36 2875.51,3370.51 R3.1 2995.36,3370.51 2995.91,3369.96 3001.22,3369.96 C1.2
NetC2_2: C2.2 U2.5 Y1.1 | length 463.7
  Top Layer w10: U2.5 2953.93,3374.87 3024.87,3374.87 3031.4,3381.4 3033.75,3381.4 v3(3035.29,3382.94)
  Bottom Layer w10: Y1.1 2830,3455 2860,3425 2988.89,3425 2992.08,3421.81 2996.91,3421.81 3002.77,3415.95 3002.77,3401.64 3018.78,3385.63 3030.43,3385.63 3033.12,3382.94 v3(3035.29,3382.94)
NetC3_1: C3.1 CP8.1 | length 79.9
  Top Layer w7: C3.1 2813.98,3268.98 CP8.1
NetCASTH1_5: CASTH1.5 U2.15 | length 171.4
  Top Layer w7: U2.15 3046.1,3058.4 3073.5,3031 CASTH1.5
NetCASTH1_6: CASTH1.6 U2.16 | length 158.8
  Top Layer w7: U2.16 3065.79,3093.9 CASTH1.6@3114.69,3045
NetCASTH1_7: CASTH1.7 U2.17 | length 196.5
  Top Layer w7: U2.17 3085.47,3124.53 3173.5,3036.5 CASTH1.7
NetCASTH1_8: CASTH1.8 U2.18 | length 226.7
  Top Layer w7: U2.18 3105.16,3129.84 3149.63,3085.37 3179.63,3085.37 3212.42,3052.58 3212.42,3052.37 3223.5,3041.28 CASTH1.8
NetCASTH1_9: CASTH1.9 U2.19 | length 246.7
  Top Layer w7: U2.19 3124.84,3147.46 3174.93,3097.37 3217.63,3097.37 3262.42,3052.58 3262.42,3052.37 3273.5,3041.28 CASTH1.9
NetCASTH2_1: CASTH2.1 U2.31 | length 284.2
  Top Layer w7: U2.31 3331.24,3354.84 3387.63,3411.23 3387.63,3472.63 CASTH2.1@3450,3535
NetCASTH2_2: CASTH2.2 U2.30 | length 267.6
  Top Layer w7: U2.30 3355.16,3335.16 3399.63,3379.63 3399.63,3449.63 CASTH2.2@3439.2,3489.2
NetCASTH2_3: CASTH2.3 U2.29 | length 237.1
  Top Layer w7: U2.29 3365.47,3315.47 3411.63,3361.63 3411.63,3402.13 3434.8,3425.3 CASTH2.3@3434.8,3434.8
NetCASTH2_4: CASTH2.4 U2.28 | length 213.4
  Top Layer w7: U2.28 3367.79,3295.79 3405.48,3333.48 3405.48,3338.51 3446.97,3380 CASTH2.4@3452,3380
NetCASTH2_5: CASTH2.5 U2.27 | length 206.5
  Top Layer w7: U2.27 3403.1,3276.1 3421.5,3294.5 3421.5,3309 3440.09,3327.59 3449.41,3327.59 CASTH2.5@3452,3325
NetCASTH2_6: CASTH2.6 U2.26 | length 199.6
  Top Layer w7: U2.26 3406.42,3256.42 3429.92,3279.92 3432.13,3279.92 3443.74,3291.52 CASTH2.6@3461.52,3291.52
NetCASTH2_7: CASTH2.7 U2.25 | length 183.6
  Top Layer w7: U2.25 CASTH2.7@3460,3236.73
NetCASTH2_8: CASTH2.8 U2.22 | length 360.4
  Top Layer w7: U2.22 3183.9,3146.85 3186.3,3144.44 3186.3,3142.34 3195.27,3133.37 3240.57,3133.37 3261.44,3112.5 3337.5,3112.5 3415,3190 CASTH2.8
NetCASTH2_9: CASTH2.9 U2.21 | length 367.7
  Top Layer w7: U2.21 3164.21,3147.46 3190.3,3121.37 3235.6,3121.37 3256.47,3100.5 3360.5,3100.5 3397.27,3137.27 3457.27,3137.27 CASTH2.9
NetCASTH3_4: CASTH3.4 U2.4 | length 257.2
  Top Layer w7: CASTH3.4 2757.5,3290 2805.37,3337.87 2805.37,3355.67 2843.91,3394.21 U2.4
NetCASTH3_5: CASTH3.5 U2.3 | length 243.9
  Top Layer w7: CASTH3.5 2789.27,3340 2793.37,3344.1 2793.37,3360.65 2846.62,3413.9 U2.3
NetCASTH3_6: CASTH3.6 U2.2 | length 221.6
  Top Layer w7: CASTH3.6 2757.5,3390 2801.08,3433.58 U2.2
NetCASTH3_7: CASTH3.7 U2.46 | length 384.8
  Top Layer w7: CASTH3.7@2755,3440 2875.74,3560.74 3027.9,3560.74 3046.1,3542.54 U2.46
NetCASTH3_8: CASTH3.8 U2.45 | length 400.3
  Top Layer w7: CASTH3.8 2767.78,3490 2777.87,3500.08 2780.08,3500.08 2854.67,3574.67 3033.65,3574.67 3065.79,3542.54 U2.45
NetCASTH3_9: CASTH3.9 U2.43 | length 431.1
  Top Layer w7: CASTH3.9 2757.5,3540 2806.84,3589.34 3058.35,3589.34 3105.16,3542.54 U2.43
NetCASTH3_10: CASTH3.10 U2.42 | length 440
  Top Layer w7: CASTH3.10 2757.27,3597.27 2784.64,3597.27 2788.72,3601.34 3066.04,3601.34 3124.84,3542.54 U2.42
NetCASTH3_11: CASTH3.11 U2.41 | length 471
  Top Layer w7: CASTH3.11 2767.78,3640 2784.02,3623.77 3063.3,3623.77 3144.53,3542.54 U2.41
NetCASTH3_12: CASTH3.12 U2.40 | length 511.4
  Top Layer w7: CASTH3.12 2755,3685 2823.18,3685 2872.42,3635.77 3070.98,3635.77 3164.21,3542.54 U2.40
NetD1_1: D1.1 R9.2 | length 29.7
  Bottom Layer w10: D1.1 2894.53,3720.98 R9.2
NetD2_1: D2.1 R10.2 | length 34.7
  Bottom Layer w10: D2.1 3014.53,3715.98 R10.2
NetD3_1: D3.1 R11.2 | length 34.7
  Bottom Layer w10: D3.1 3119.53,3715.98 R11.2
NetIC1_11: IC1.11 TP17.1 | length 160.1
  Top Layer w10: TP17.1 2838.12,2070 2848.12,2080 2912.43,2080 2927.27,2094.84 IC1.11
NetIC1_12: IC1.12 TP19.1 | length 93.4
  Top Layer w10: TP19.1 2945.44,2050 2951.3,2055.86 2951.3,2065.39 2955.16,2069.25 IC1.12
NetIC1_19: IC1.19 TP10.1 | length 75.8
  Top Layer w10: IC1.19 3277.8,2222.8 TP10.1
NetIC1_20: IC1.20 TP8.1 | length 159.7
  Top Layer w10: IC1.20 3255.96,2248.39 3262.57,2255 3297.43,2255 3302.43,2260 TP8.1
NetIC1_22: IC1.22 TP28.1 | length 163.3
  Top Layer w10: IC1.22 3247.14,2299.57 3262.57,2315 3297.43,2315 3302.43,2320 TP28.1
NetIC1_23: IC1.23 R14.1 TP25.1 | length 259.9
  Top Layer w10: R14.1 3135,2360.51 3135,2335 3144.84,2325.16 IC1.23 3251.52,2325.16 3271.36,2345 TP25.1
NetR3_2: R3.2 U2.6 | length 125.1
  Top Layer w5: v3(2904.27,3351.51) 2906.29,3353.54 2952.28,3353.54 U2.6
  Bottom Layer w5: v3(2904.27,3351.51) 2905.55,3350.23 2905.55,3339.45 2933.7,3311.3 2953.18,3311.3 R3.2
NetR7_2: R7.2 TP3.1 | length 55.7
  Bottom Layer w8: R7.2 3150,3444.49 TP3.1
NetR8_1: R8.1 TP4.1 | length 49.5
  Bottom Layer w8: R8.1 TP4.1
NetS_PAD1_1: S_PAD1.1 U3.3 | length 94.1
  Top Layer w30: U3.3 S_PAD1.1
NetS_PAD2_1: S_PAD2.1 U3.8 | length 94.1
  Top Layer w30: U3.8 S_PAD2.1
NetS_PAD3_1: S_PAD3.1 U3.13 | length 99.1
  Top Layer w30: S_PAD3.1 U3.13
NetS_PAD4_1: S_PAD4.1 U3.18 | length 94.1
  Top Layer w30: S_PAD4.1 U3.18
NetS_PAD5_1: S_PAD5.1 U4.3 | length 94.1
  Top Layer w30: U4.3 S_PAD5.1
NetS_PAD6_1: S_PAD6.1 U4.8 | length 96.1
  Top Layer w30: S_PAD6.1@2855,1925 2860,1920 U4.8
NetS_PAD7_1: S_PAD7.1 U4.13 | length 94.1
  Top Layer w30: S_PAD7.1 U4.13
NetS_PAD8_1: S_PAD8.1 U4.18 | length 94.1
  Top Layer w30: S_PAD8.1 U4.18
NetU2_10: U2.10
OE: IC1.21 Q6.2 Q8.3 R18.1 R20.2 TP30.1 | length 675.9
  Top Layer w10: Q8.3 3338.66,2545.63 Q6.2 3340.63,2501.14 R18.1@3325,2485.51 ; TP30.1 3269.14,2285 3254.14,2270 3234.56,2270 3234.44,2270.12 3164.88,2270.12 3105,2330 3105,2390 3165,2450 3290.51,2450 R20.2
OE_3v3: CASTH1.4 Q6.1 Q8.1 U2.14 | length 872.9
  Top Layer w10: U2.14 3026.42,3126.42 3010,3110 3010,3045 3023.5,3031.5 CASTH1.4 3016.8,3016.8 3016.8,2943.2 3060,2900 3238.52,2900 3275,2863.52 3275,2665 3285.15,2654.85 3285.15,2642.94 3286.65,2641.44 3286.65,2637.09 Q8.1@3298.39,2625.35 ; Q8.1 3307.6,2624.37 Q6.1@3335.74,2624.37 ; Q8.1@3307.6,2622.4 3335.74,2622.4 Q6.1 3338.19,2624.84 Q6.1@3335.74,2627.29
OUT0: IC1.5 TP7.1 U4.11 | length 1215.2
  Top Layer w10: U4.11 2760,1473.38 2767.2,1480.58 2772.22,1480.58 2807.04,1515.39 2925.39,1515.39 v1(3005,1595) ; TP7.1 2867.57,2250 2877.57,2260 2912.43,2260 2924.04,2248.39 IC1.5 3034.52,2248.39 v1(3034.85,2248.72)
  Bottom Layer w10: v1(3005,1595) 3005,1598.36 3020,1613.36 3020,1818.79 3030,1828.79 3030,2105.42 3037.96,2113.38 3037.96,2115.43 3045.93,2123.4 3045.93,2132.04 3047.5,2133.61 3047.5,2181.46 3034.85,2194.11 v1(3034.85,2248.72)
OUT1: IC1.6 TP9.1 U4.1 | length 841.2
  Top Layer w10: TP9.1 2930,2230 2935,2225 2972.64,2225 2975.17,2222.47 3026.64,2222.47 3035.65,2213.46 v1(3084.01,2213.46) v1@3085.94,2213.46 ; v1(3137.5,1742.93) 3142.28,1747.71 3157.19,1747.71 3210,1800.52 U4.1
  Bottom Layer w10: v1(3084.01,2213.46) 3090.78,2213.46 3101.74,2202.5 3106.39,2202.5 3130.86,2178.03 3130.86,2169.75 3122.5,2161.39 3122.5,2058.61 3150,2031.11 3150,1761.29 3137.5,1748.79 v1(3137.5,1742.93)
OUT2: IC1.7 TP11.1 U4.19 | length 1123.9
  Top Layer w10: TP11.1 2838.12,2190 2848.12,2200 2912.43,2200 2915.22,2197.2 IC1.7 3042.8,2197.2 3065,2175 v1(3095,2175) ; v1(3055,1520) 3125,1520 3140,1505 3154.05,1490.95 3154.05,1487.77 3160,1481.82 U4.19
  Bottom Layer w10: v1(3055,1520) 3110,1575 3110,2049.9 3107.5,2052.4 3107.5,2146.13 3099.78,2153.85 3099.78,2170.22 v1(3095,2175)
OUT3: IC1.8 TP12.1 U4.12 | length 1070.7
  Top Layer w10: U4.12 2810,1473.38 2817.2,1480.58 2822.22,1480.58 2842.04,1500.39 2955.39,1500.39 3002.02,1547.02 3004.14,1547.02 3012.68,1555.55 v1(3019.45,1555.55) ; TP12.1 2973.23,2170 2976.75,2173.52 3041.55,2173.52 3075,2140.07 v1(3075,2138.43)
  Bottom Layer w10: v1(3019.45,1555.55) 3019.45,1562.32 3027.98,1570.86 3027.98,1572.98 3035,1580 3035,1812.57 3045,1822.57 3045,2099.21 3052.96,2107.17 3052.96,2107.96 3068.64,2123.64 3068.64,2125.31 3075,2131.67 v1(3075,2138.43)
OUT4: IC1.9 TP13.1 U4.9 | length 824.5
  Top Layer w10: U4.9 2810,1800 2830.39,1779.61 2965.39,1779.61 v1(2985,1760) ; TP13.1 2867.57,2130 2877.57,2140 2912.43,2140 2918.45,2146.02 2973.82,2146.02 2974.84,2145 2975.35,2145.51 3019.49,2145.51 v1(3020,2145)
  Bottom Layer w10: v1(2985,1760) 3005,1780 3005,1825 3015,1835 3015,2113.24 3015.22,2113.45 3015.22,2140.22 v1(3020,2145)
OUT5: IC1.10 TP15.1 U4.2 | length 679.1
  Top Layer w10: TP15.1 2900.74,2115.74 2920.74,2115.74 2930,2125 2945.44,2125 2946.15,2124.29 2970.98,2124.29 IC1.10 2978.7,2116.57 3012.36,2116.57 3018.22,2110.72 3049.6,2110.72 v1(3072.5,2087.82) ; v1(3080,1755) 3083.36,1755 3098.36,1770 3130,1770 3160,1800 U4.2
  Bottom Layer w10: v1(3072.5,2087.82) 3072.5,2081.96 3060,2069.46 3060,1816.36 3055,1811.36 3055,1780 v1(3080,1755)
OUT8: IC1.13 TP22.1 U3.11 | length 1673.2
  Top Layer w10: U3.11 2762.5,736.56 2762.5,792.5 2800,830 v1(2835,830) ; v1(3150,2070) 3150.21,2069.79 3204.61,2069.79 IC1.13 3224.84,2069.25 3228.7,2065.39 3228.7,2061.3 3245,2045 TP22.1
  Bottom Layer w10: v1(2835,830) 2835.48,830.48 2835.48,855.48 3165,1185 3165,2051.64 3150,2066.64 v1(3150,2070)
OUT9: IC1.14 TP21.1 U3.1 | length 1281.8
  Top Layer w10: IC1.14 3205.27,2094.73 3242.84,2094.73 3262.57,2075 3320,2075 ; U3.1 3210,1088.27 3233.27,1065 v1(3240,1065) ; v1(3330,2045) 3330,2051.76 3320,2061.76 3320,2075 ; TP21.1 3320,2075
  Bottom Layer w10: v1(3240,1065) 3240,1955 v1(3330,2045)
OUT10: IC1.15 TP20.1 U3.19 | length 1560.5
  Top Layer w10: U3.19 3160,793.24 3170,803.24 v1(3170,810) ; IC1.15 3224.84,2120.43 3231.57,2113.7 3245.09,2113.7 3249.64,2109.14 3275.86,2109.14 TP20.1 v1(3320,2105)
  Bottom Layer w10: v1(3170,810) 3190,830 3190,946.95 3187.5,949.45 3187.5,1066.39 3225,1103.89 3225,1990 3315.22,2080.22 3315.22,2100.22 v1(3320,2105)
OUT11: IC1.16 TP18.1 U3.12 | length 1831
  Top Layer w10: U3.12 2812.5,736.56 2812.5,789.14 2825.86,802.5 2846.39,802.5 2848.89,805 v1(2885,805) ; v1(3150,2150) 3150.21,2149.79 3201.39,2149.79 IC1.16 3251.55,2146.02 3262.57,2135 TP18.1
  Bottom Layer w10: v1(2885,805) 2885,875 3180,1170 3180,2120 v1(3150,2150)
OUT12: IC1.17 TP16.1 U3.9 | length 1763.2
  Top Layer w10: U3.9 2810,1085 2850,1045 3097.02,1045 3099.76,1047.74 3110.6,1047.74 v1(3115.38,1052.52) ; v1(3135,2215) 3174.53,2175.47 3201.3,2175.47 IC1.17 3260.27,2171.61 3266.88,2165 TP16.1
  Bottom Layer w10: v1(3115.38,1052.52) 3119.99,1057.12 3119.99,1073.88 3195,1148.89 3195,2056.21 3200,2061.21 3200,2179.14 3186.64,2192.5 3157.5,2192.5 v1(3135,2215)
OUT13: IC1.18 TP14.1 U3.2 | length 1446.8
  Top Layer w10: v1(3160,1045) U3.2 ; IC1.18 3207.36,2195 3325,2195 ; v1(3327.17,2170.27) 3325.47,2171.97 3325.47,2194.53 3325,2195 ; TP14.1 3325,2195
  Bottom Layer w10: v1(3160,1045) 3160,1050.86 3172.5,1063.36 3172.5,1072.6 3210,1110.1 3210,2050 3325,2165 3325,2168.1 v1(3327.17,2170.27)
RESET: C3.2 CP9.1 R6.1 U2.7 | length 270.5
  Top Layer w7: R6.1 2862.59,3218.1 2862.59,3227.59 C3.2 ; CP9.1 2858.93,3360 2873.93,3345 2886.03,3345 2906.67,3324.36 ; C3.2@2880,3255 2880,3284.7 2888.5,3293.2 2888.5,3320.26 2892.6,3324.36 2906.67,3324.36 ; U2.7 2917.46,3335.16 2906.67,3324.36
SDI: IC1.2 Q1.2 Q3.3 R12.1 R15.2 TP26.1 | length 737.9
  Top Layer w10: Q3.3 Q1.2@2883.66,2770.63 ; Q1.2 Q1.2@2883.66,2770.63 ; TP26.1 2900.74,2344.26 2920.74,2344.26 2940,2325 2974.68,2325 IC1.2 3018.63,2325.16 3024.49,2331.02 3024.49,2364.28 2870,2518.77 2870,2700.51 R12.1 2883.66,2725.83 Q1.2@2883.66,2770.63
SDI_3v3: CASTH1.1 Q1.1 Q3.1 U2.11 | length 562.6
  Top Layer w7: 2850,3010 2855.95,3010 2863.5,3017.55 2863.5,3023.5 CASTH1.1 ; CASTH1.1@2862.25,3023.5 2862.25,3042.25 2872.28,3042.25 2878.58,3048.55 2878.58,3058.58 2920,3100 2920,3207.97 2900.23,3227.74 2900.23,3239.19 2917.46,3256.42 U2.11
  Top Layer w10: Q3.1@2842.4,2847.4 2853.15,2836.65 2874.88,2836.65 Q1.1 ; Q3.1 2850,2856.97 2850,3010
SWCLK: CP3.1 R5.1 U2.37 | length 410
  Top Layer w7: CP3.1 2965,3747.98 2990,3722.98 2990,3690.51 3020.74,3659.77 3080.92,3659.77 3092.92,3647.77 3126.98,3647.77 3161.74,3613 3161.74,3610.17 3196.51,3575.41 3203.66,3575.41 3223.27,3555.8 U2.37
SWDIO: CP2.1 R4.1 R9.1 U2.34 | length 771
  Top Layer w7: CP2.1 3043.53,3746.47 3043.53,3731.47 3061.87,3713.13 3061.87,3687.62 3066.49,3683 3091.72,3683 3098.49,3676.23 3098.49,3666.54 3105.26,3659.77 3131.95,3659.77 3174.15,3617.57 3174.15,3614.74 3201.48,3587.41 3208.63,3587.41 3237.67,3558.36 3237.67,3539.48 3251.79,3525.36 3299.78,3525.36 3304.65,3530.23 3341.15,3530.23 3345.25,3526.13 3345.25,3446.61 3312.54,3413.9 U2.34
  Bottom Layer w7: R9.1 2925.79,3690.28 3039.72,3690.28 v3(3045,3685)

## Polygon pours and split planes (outlines as drawn)
GND on Bottom Layer "NONET_L02_P001" (solid, shelved, pour order 1): 2710,3780 2715,3785 3495,3785 3495,580 2710,580
3V3 on Bottom Layer "NONET_L02_P000" (solid, remove dead copper, shelved, pour order 0): 3360,3590 3360,3265 3240,3265 3240,3590
GND on Top Layer "NONET_L-01_P-001" (solid, shelved, pour order 2): 3175,3780 3180,3785 3490,3785 3490,3600 3480.53,3609.47 3179.42,3609.47

## Other copper
Bottom Layer:
  pour cut-out: 2800,3070 2825,3095 2825,3100 2790,3100 2785,3105 2785,3300 2680,3280 2650,3205 2650,3050 2785,3050 2805,3070
  pour cut-out: 2710,2990 2717,2997 2840,2997 2840,3040 2815,3065 2720,3065 2705,3050 2700,3050
  pour cut-out: 3110,3635 3115,3630 3115,3615 3140,3615 3145,3620 3145,3635 3140,3635